# Altium PCB KEYPAD.PcbDoc
Units mil, origin at the board's own origin, x right, y up, seen from the top; angles counter-clockwise.
Board outline 6000 x 4000 mil, 2 copper layers (Top Layer, Bottom Layer); 2 components, 10 nets, 18 pads, 0 vias.
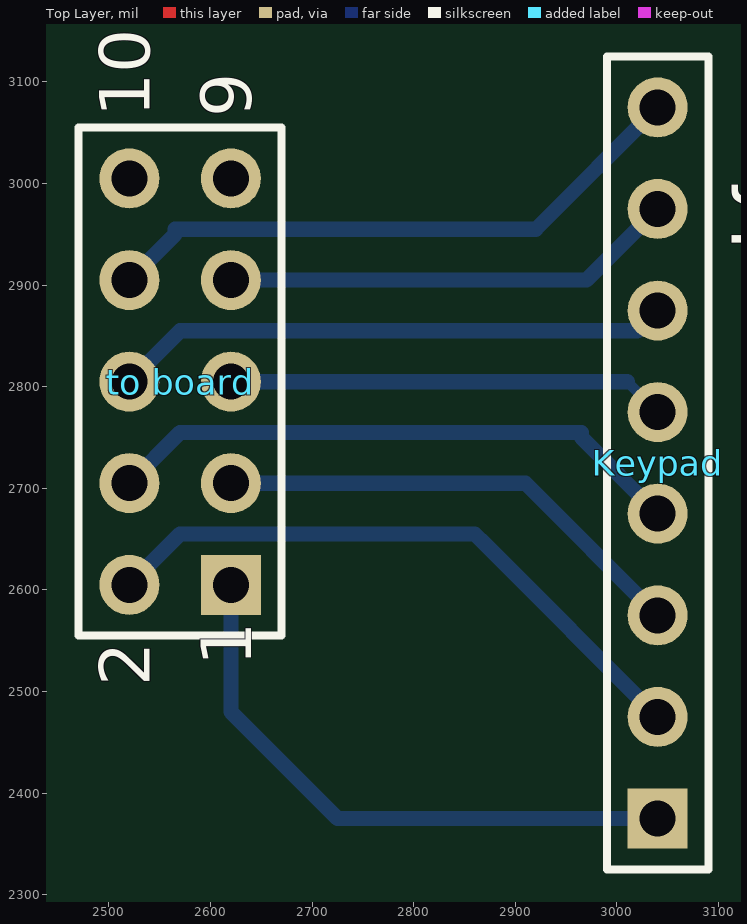
[diagram p0: Top Layer view]
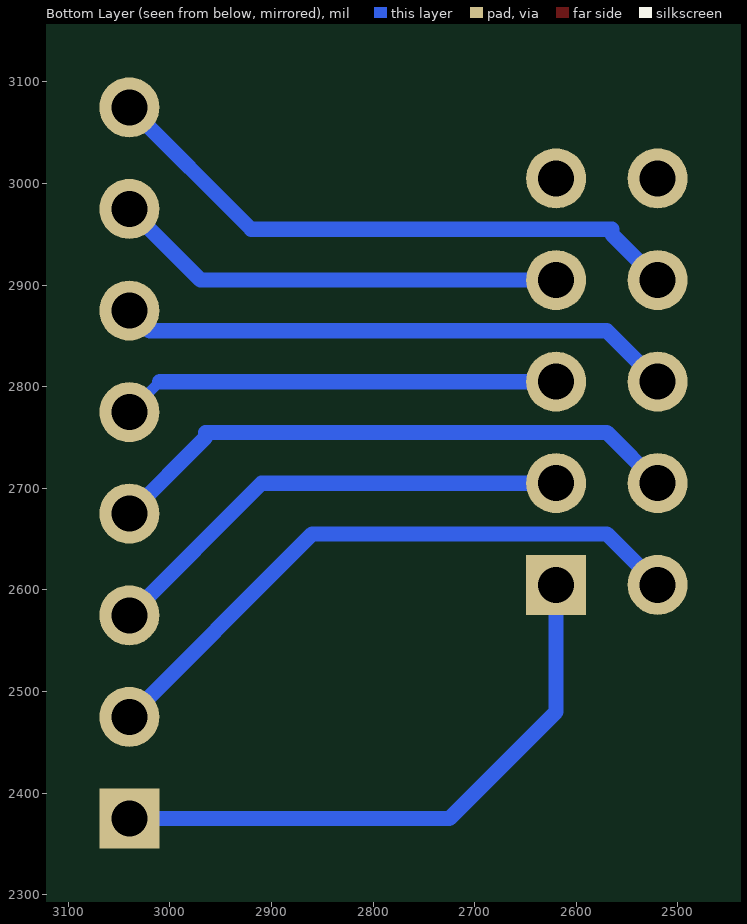
[diagram p1: Bottom Layer view, seen from below]

## Layer stack, top to bottom
Top Solder: solder mask 0.4, Solder Resist, Dk 3.5
Top Layer: signal copper 1.4
Dielectric 1: dielectric 12.6, FR-4, Dk 4.8
Bottom Layer: signal copper 1.4
Bottom Solder: solder mask 0.4, Solder Resist, Dk 3.5

## Board outline
1000,1000 7000,1000 7000,5000 1000,5000

## Design rules (kind name [scope] priority, off if disabled: settings)
Clearance [All] p1: gap=10
PolygonConnect [All] p1: connectstyle=Relief reliefconductorwidth=10 reliefentries=4 polygonreliefangle="90 Angle" airgapwidth=10
RoomDefinition KEYPAD [InComponentClass('KEYPAD')] p1: confinementstyle=ConfineIn formatcopy=TRUE lockcomponents=FALSE outline 2335,2265 3255,2265 3255,3200 2335,3200
RoutingVias [All] p1: holewidth=28 width=50 viastyle="Through Hole" minholewidth=28 minwidth=50 maxholewidth=28 maxwidth=50
SolderMaskExpansion [All] p1: expansion=4
Width [All] p1: maxlimit=50 minlimit=10 preferedwidth=10
30 further rules are at their usual default settings.

## Components (designator, comment, footprint, x,y, rotation, side; value= is the part's Value field where it differs from the comment)
Keypad "Header 8" HDR1X8 3040,2375 r90 top
"to board" "Header 5X2" HDR2X5 2620,2605 r90 top

## Footprints (in the part's own frame and the unit in brackets; to place one, negate y for a bottom-side part, rotate by r counter-clockwise, add the part's x,y. Pads: shape width x height; smd on the part's side, far side on the other; paste and mask are expansions set on the pad)
HDR1X8 [mm] "Connector; Header; 8 Position"
  rect 1.5x1.5 hole 0.9: 1(0,0)
  round 1.5 hole 0.9: 2(2.54,0) 3(5.08,0) 4(7.62,0) 5(10.16,0) 6(12.7,0) 7(15.24,0) 8(17.78,0)
  silkscreen extent -1.27,-1.27 19.05,1.27
HDR2X5 [mm] "Connector; Header; 5x2 Position"
  rect 1.5x1.5 hole 0.9: 1(0,0)
  round 1.5 hole 0.9: 2(0,2.54) 3(2.54,0) 4(2.54,2.54) 5(5.08,0) 6(5.08,2.54) 7(7.62,0) 8(7.62,2.54) 9(10.16,0) 10(10.16,2.54)
  silkscreen extent -1.27,-1.27 11.43,3.81

## Part data
Keypad: "Header, 8-Pin"
"to board": "Header, 5-Pin, Dual row"

## Nets (pads, with @x,y where several pads share a name; then routed paths per layer and width w, separated by ;. In a path a pad name is that pad's centre, name@x,y a point inside that pad or via, vN(x,y) a via of type N, cw(c..) or ccw(c..) an arc to the next point about the centre after c; other vN are vias at no path point)
GND: "to board.10"
IO32: "to board.1" Keypad.1 | length 588.5
  Bottom Layer w15: 2620,2605 2620,2480 2725,2375 Keypad.1
IO33: "to board.2" Keypad.2 | length 615.3
  Bottom Layer w15: 2520,2605 2560,2645 2570,2655 2860,2655 2870,2645 Keypad.2
IO34: "to board.3" Keypad.3 | length 473.8
  Bottom Layer w15: 2620,2705 2910,2705 Keypad.3
IO35: "to board.4" Keypad.4 | length 576.8
  Bottom Layer w15: 2520,2705 2570,2755 2965,2755 2965,2750 Keypad.4
IO36: "to board.5" Keypad.5 | length 432.4
  Bottom Layer w10: 3010,2805 Keypad.5
  Bottom Layer w15: 2620,2805 3010,2805
IO37: "to board.6" Keypad.6 | length 549
  Bottom Layer w15: 2520,2805 2570,2855 3020,2855 Keypad.6
IO38: "to board.7" Keypad.7 | length 449
  Bottom Layer w15: 2620,2905 2970,2905 Keypad.7
IO39: "to board.8" Keypad.8 | length 588.3
  Bottom Layer w15: 2520,2905 2565,2950 ; 2565,2955 2920,2955 Keypad.8
VCC: "to board.9"

## Text inside footprints (layer, text, board x,y; h text height)
"to board": Top Overlay "10" at 2540,3065 h50 r90; Top Overlay "9" at 2640,3065 h50 r90; Top Overlay "1" at 2640,2525 h50 r90; Top Overlay "2" at 2540,2505 h50 r90